# EAGLE board snc98_Display_15x7-Seg_1-digit_SC52 (EAGLE 6.6.0), part 1 of 3
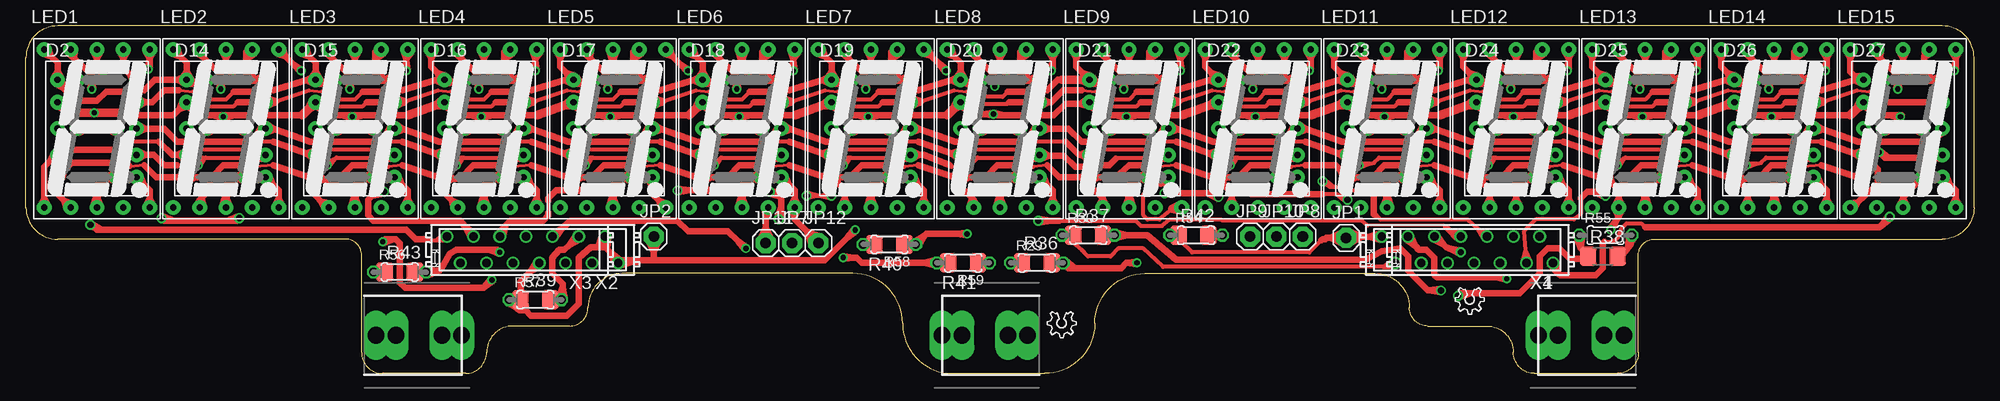
[diagram p0: board, top side]
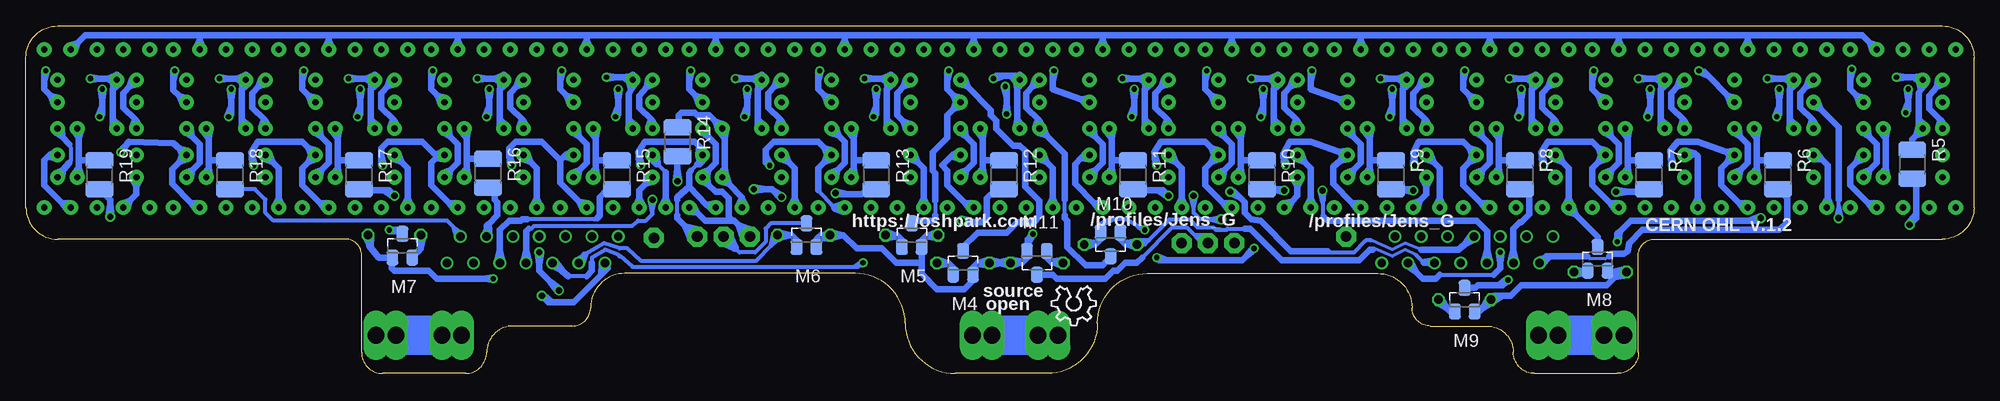
[diagram p1: board, bottom side, seen from below]

Size 187.96 x 33.53 mm. Coordinates in mm from the lower left corner, seen from the top.
Outline: 187.96,30.48 arc90 184.91,33.53 3.05,33.53 arc90 0,30.48 0,16 arc90 3.05,12.95 30.86,12.95 arc-90 32.38,11.43 32.38,2.03 arc90 34.42,0 42.42,0 arc90 44.45,2.03 arc-90 46.99,4.57 52.45,4.57 arc90 54.23,6.35 arc-90 57.53,9.65 79.76,9.65 arc-90 84.58,4.83 arc90 89.41,0 98.3,0 arc90 103.12,4.83 arc-90 107.95,9.65 130.18,9.65 arc-90 133.48,6.35 arc90 135.25,4.57 140.97,4.57 arc-90 143.51,2.03 arc90 145.54,0 153.54,0 arc90 155.57,2.03 155.57,11.43 arc-90 157.1,12.95 184.91,12.95 arc90 187.96,16 187.96,30.48
Copper layers (1*16): Top 0.0356mm / dielectric 1.5011mm / Bottom 0.0356mm
Design rules "OSHPark-2layer *": minimum track width 12mil, minimum drill 13mil, track to track 6mil, track to pad 6mil, pad to pad 6mil, via to via 6mil, smd to smd 6mil, copper to edge 15mil, drill to drill 6mil, minimum pad ring 7mil, minimum via ring 7mil, stop-mask expansion 2.5mil, vias tented up to drill 0mil, thermal gap 10mil

## Footprints (pad centres in the part's own frame; a part is rotated, then mirrored left to right if it is on the bottom)
BATTERY-AAA-LEFT = drill 1.6 long: P1 -2.413,0; P2 3.937,0; P3 2.032,0; P4 -4.318,0
BATTERY-AAA-RIGHT = drill 1.6 long: M1 -3.937,0; M2 2.413,0; M3 4.318,0; M4 -2.032,0
10MM_UNI = drill 0.6 pad 1.422: 1 -3.81,4.699; 2 -3.81,2.54; 3 -3.81,0; 4 -3.81,-2.54; 5 -3.81,-4.699; 6 3.81,-4.699; 7 3.81,-2.54; 8 3.81,0; 9 3.81,2.54; 10 3.81,4.699; 11 -1.905,4.699; 12 -1.905,0; 13 1.905,0; 14 1.905,-4.699
1X01 = drill 1.016 pad 1.93 octagon: 1 0,0
SA52-11 = drill 0.6 pad 1.422: 1 -5.08,-7.62; 2 -2.54,-7.62; 3 0,-7.62; 4 2.54,-7.62; 5 5.08,-7.62; 6 5.08,7.62; 7 2.54,7.62; 8 0,7.62; 9 -2.54,7.62; 10 -5.08,7.62
SOT-23 = smd 1.143 x 1.524: 1 0.953,1.143; 2 -0.953,1.143; 3 0,-1.143
R1210 = smd 1.6 x 2.7: 1 -1.4,0; 2 1.4,0
0204/5 = drill 0.813 octagon: 1 -2.54,0; 2 2.54,0
R1206 = smd 1.6 x 1.803: 1 -1.422,0; 2 1.422,0
MICROMATCH-12 = drill 0.813: 1 6.985,-1.27; 2 5.715,1.27; 3 4.445,-1.27; 4 3.175,1.27; 5 1.905,-1.27; 6 0.635,1.27; 7 -0.635,-1.27; 8 -1.905,1.27; 9 -3.175,-1.27; 10 -4.445,1.27; 11 -5.715,-1.27; 12 -6.985,1.27
MICROMATCH-14 = drill 0.813: 1 8.255,-1.27; 2 6.985,1.27; 3 5.715,-1.27; 4 4.445,1.27; 5 3.175,-1.27; 6 1.905,1.27; 7 0.635,-1.27; 8 -0.635,1.27; 9 -1.905,-1.27; 10 -3.175,1.27; 11 -4.445,-1.27; 12 -5.715,1.27; 13 -6.985,-1.27; 14 -8.255,1.27

## Placement (x,y rotation side)
BH4  HOLDER_AAA_LEFT1  [BATTERY-AAA-LEFT]  150.24,3.68 0 top
BH5  HOLDER_AAA_LEFT1  [BATTERY-AAA-LEFT]  92.71,3.68 0 top
BH6  HOLDER_AAA_RIGHT  [BATTERY-AAA-RIGHT]  37.72,3.68 0 top
D2  SC40-11_UNISC40-11_UNI  [10MM_UNI]  6.86,23.62 0 top
D14  SC40-11_UNISC40-11_UNI  [10MM_UNI]  19.3,23.62 0 top
D15  SC40-11_UNISC40-11_UNI  [10MM_UNI]  31.75,23.62 0 top
D16  SC40-11_UNISC40-11_UNI  [10MM_UNI]  44.2,23.62 0 top
D17  SC40-11_UNISC40-11_UNI  [10MM_UNI]  56.64,23.62 0 top
D18  SC40-11_UNISC40-11_UNI  [10MM_UNI]  69.09,23.62 0 top
D19  SC40-11_UNISC40-11_UNI  [10MM_UNI]  81.53,23.62 0 top
D20  SC40-11_UNISC40-11_UNI  [10MM_UNI]  93.98,23.62 0 top
D21  SC40-11_UNISC40-11_UNI  [10MM_UNI]  106.43,23.62 0 top
D22  SC40-11_UNISC40-11_UNI  [10MM_UNI]  118.87,23.62 0 top
D23  SC40-11_UNISC40-11_UNI  [10MM_UNI]  131.32,23.62 0 top
D24  SC40-11_UNISC40-11_UNI  [10MM_UNI]  143.76,23.62 0 top
D25  SC40-11_UNISC40-11_UNI  [10MM_UNI]  156.21,23.62 0 top
D26  SC40-11_UNISC40-11_UNI  [10MM_UNI]  168.66,23.62 0 top
D27  SC40-11_UNISC40-11_UNI  [10MM_UNI]  181.1,23.62 0 top
JP1  [1X01]  127.38,13.08 0 top
JP2  [1X01]  60.58,13.21 0 top
JP7  [1X01]  73.91,12.57 0 top
JP8  [1X01]  123.19,13.21 0 top
JP9  [1X01]  118.11,13.21 0 top
JP10  [1X01]  120.65,13.21 0 top
JP11  [1X01]  71.37,12.57 0 top
JP12  [1X01]  76.45,12.57 0 top
LED1  7-SEG_SC52-11  [SA52-11]  6.86,23.62 0 top
LED2  7-SEG_SC52-11  [SA52-11]  19.3,23.62 0 top
LED3  7-SEG_SC52-11  [SA52-11]  31.75,23.62 0 top
LED4  7-SEG_SC52-11  [SA52-11]  44.2,23.62 0 top
LED5  7-SEG_SC52-11  [SA52-11]  56.64,23.62 0 top
LED6  7-SEG_SC52-11  [SA52-11]  69.09,23.62 0 top
LED7  7-SEG_SC52-11  [SA52-11]  81.53,23.62 0 top
LED8  7-SEG_SC52-11  [SA52-11]  93.98,23.62 0 top
LED9  7-SEG_SC52-11  [SA52-11]  106.43,23.62 0 top
LED10  7-SEG_SC52-11  [SA52-11]  118.87,23.62 0 top
LED11  7-SEG_SC52-11  [SA52-11]  131.32,23.62 0 top
LED12  7-SEG_SC52-11  [SA52-11]  143.76,23.62 0 top
LED13  7-SEG_SC52-11  [SA52-11]  156.21,23.62 0 top
LED14  7-SEG_SC52-11  [SA52-11]  168.66,23.62 0 top
LED15  7-SEG_SC52-11  [SA52-11]  181.1,23.62 0 top
LOGO1  OSHW_LOGO_8MILX0150-NT  [OSHW_8X150_NOTEXT]  84.73,8.43 180 bottom
LOGO2  OSHW_LOGO_6MILX0100-NT  [OSHW_6X100_NOTEXT]  101.35,5.97 180 top
LOGO3  OSHW_LOGO_6MILX0100-NT  [OSHW_6X100_NOTEXT]  140.72,8.26 180 top
M4  IRLML2244  [SOT-23]  97.54,10.67 180 bottom
M5  IRLML2244  [SOT-23]  102.49,13.34 180 bottom
M6  IRLML2244  [SOT-23]  112.65,13.34 180 bottom
M7  IRLML2244  [SOT-23]  151.64,12.32 180 bottom
M8  IRLML2244  [SOT-23]  36.32,11.05 180 bottom
M9  IRLML2244  [SOT-23]  49.15,7.11 180 bottom
M10  IRLML2244  [SOT-23]  83.31,12.45 0 bottom
M11  IRLML2244  [SOT-23]  90.42,10.67 0 bottom
R5  22  [R1210]  5.97,20.19 270 bottom
R6  22  [R1210]  18.92,19.18 270 bottom
R7  22  [R1210]  31.37,19.18 270 bottom
R8  22  [R1210]  43.81,19.18 270 bottom
R9  22  [R1210]  56.26,19.18 270 bottom
R10  22  [R1210]  68.71,19.18 270 bottom
R11  22  [R1210]  81.15,19.18 270 bottom
R12  22  [R1210]  93.6,19.18 270 bottom
R13  22  [R1210]  105.92,19.18 270 bottom
R14  22  [R1210]  125.09,22.35 270 bottom
R15  22  [R1210]  130.94,19.18 270 bottom
R16  22  [R1210]  143.38,19.3 270 bottom
R17  22  [R1210]  155.83,19.18 270 bottom
R18  22  [R1210]  168.28,19.18 270 bottom
R19  22  [R1210]  180.85,19.18 270 bottom
R29  3k3  [0204/5]  97.54,10.67 0 top
R30  3k3  [0204/5]  102.49,13.34 0 top
R36  3k3  [R1206]  97.54,10.67 0 top
R37  3k3  [R1206]  102.49,13.34 0 top
R38  3k3  [R1206]  152.15,11.3 0 top
R39  3k3  [R1206]  49.15,7.11 0 top
R40  3k3  [R1206]  83.31,12.45 180 top
R41  3k3  [R1206]  90.42,10.67 180 top
R42  3k3  [R1206]  112.65,13.34 0 top
R43  3k3  [R1206]  36.07,9.78 0 top
R54  3k3  [0204/5]  112.9,13.34 0 top
R55  3k3  [0204/5]  152.4,13.34 0 top
R56  3k3  [0204/5]  36.07,9.78 0 top
R57  3k3  [0204/5]  49.15,7.11 0 top
R58  3k3  [0204/5]  83.31,12.45 180 top
R59  3k3  [0204/5]  90.42,10.67 180 top
X1  MICROMATCH-12  [MICROMATCH-12]  140.34,11.94 180 top
X2  MICROMATCH-14  [MICROMATCH-14]  48.9,11.94 180 top
X3  MICROMATCH-12  [MICROMATCH-12]  47.62,11.94 180 top
X4  MICROMATCH-14  [MICROMATCH-14]  139.06,11.94 180 top

## Library data of the parts
BH4-BH6 = SparkFun-Electromechanical
D2 D14-D27 = display-hp
JP1 JP2 JP7-JP12 = adafruit
LED1-LED15 = display-kingbright; OC_FARNELL: unknown; OC_NEWARK: unknown
LOGO1-LOGO3 = ohw-logo
M4-M11 = IRLML6402
R5-R19 R29 R30 R36-R43 R54-R59 = rcl
X1 X3 = Con-amp-micromatch; MF: FARNELL; MPN: 8-215464-2; OC_FARNELL: 3784666; OC_NEWARK: 95H9857
X2 X4 = Con-amp-micromatch; MF: FARNELL; MPN: 8-215464-4; OC_FARNELL: 3784678; OC_NEWARK: 19J6431

## Nets
CA_LED: JP1.1 JP2.1 M4.2 M5.2 M6.2 M7.2 M8.2 M9.2 M10.2 M11.2 R29.1 R30.1 R36.1 R37.1 R38.1 R39.1 R40.1 R41.1 R42.1 R43.1 R54.1 R55.1 R56.1 R57.1 R58.1 R59.1 X2.8 X2.13 X2.14 X3.8 X4.1 X4.2
D0_A: R5.2 X2.1 X3.1
D1_A: R6.2 X2.2 X3.2
D2_A: R7.2 X2.3 X3.3
D3_A: R8.2 X2.4 X3.4
D4_A: R9.2 X2.5 X3.5
D5_A: R10.2 X2.6 X3.6
D6_A: R11.2 X2.7 X3.7
D7_A: R12.2 X1.5 X4.7
D8_A: R13.2 X1.6 X4.8
D9_A: R14.2 X1.7 X4.9
D10_A: R15.2 X1.8 X4.10
D11_A: R16.2 X1.9 X4.11
D12_A: R17.2 X1.10 X4.12
D13_A: R18.2 X1.11 X4.13
D14_A: R19.2 X1.12 X4.14
DIG_0: D2.11 D2.12 D2.13 D2.14 LED1.3 LED1.8 R5.1
DIG_1: D14.11 D14.12 D14.13 D14.14 LED2.3 LED2.8 R6.1
DIG_2: D15.11 D15.12 D15.13 D15.14 LED3.3 LED3.8 R7.1
DIG_3: D16.11 D16.12 D16.13 D16.14 LED4.3 LED4.8 R8.1
DIG_4: D17.11 D17.12 D17.13 D17.14 LED5.3 LED5.8 R9.1
DIG_5: D18.11 D18.12 D18.13 D18.14 LED6.3 LED6.8 R10.1
DIG_6: D19.11 D19.12 D19.13 D19.14 LED7.3 LED7.8 R11.1
DIG_7: D20.11 D20.12 D20.13 D20.14 LED8.3 LED8.8 R12.1
DIG_8: D21.11 D21.12 D21.13 D21.14 LED9.3 LED9.8 R13.1
DIG_9: D22.11 D22.12 D22.13 D22.14 LED10.3 LED10.8 R14.1
DIG_10: D23.11 D23.12 D23.13 D23.14 LED11.3 LED11.8 R15.1
DIG_11: D24.11 D24.12 D24.13 D24.14 LED12.3 LED12.8 R16.1
DIG_12: D25.11 D25.12 D25.13 D25.14 LED13.3 LED13.8 R17.1
DIG_13: D26.11 D26.12 D26.13 D26.14 LED14.3 LED14.8 R18.1
DIG_14: D27.11 D27.12 D27.13 D27.14 LED15.3 LED15.8 R19.1
IO-A: M4.1 R29.2 R36.2 X1.4 X4.6
IO-B: M5.1 R30.2 R37.2 X1.3 X4.5
IO-C: M6.1 R42.2 R54.2 X1.2 X4.4
IO-D: M7.1 R38.2 R55.2 X1.1 X4.3
IO-DP: M11.1 R41.2 R59.2 X2.9 X3.9
IO-E: M8.1 R43.2 R56.2 X2.12 X3.12
IO-F: M9.1 R39.2 R57.2 X2.11 X3.11
IO-G: M10.1 R40.2 R58.2 X2.10 X3.10
NC1: BH4.P1 BH4.P2 BH4.P3 BH4.P4
NC2: BH5.P1 BH5.P2 BH5.P3 BH5.P4
NC3: BH6.M1 BH6.M2 BH6.M3 BH6.M4
SEG_A: D2.10 D14.10 D15.10 D16.10 D17.10 D18.10 D19.10 D20.10 D21.10 D22.10 D23.10 D24.10 D25.10 D26.10 D27.10 LED1.7 LED2.7 LED3.7 LED4.7 LED5.7 LED6.7 LED7.7 LED8.7 LED9.7 LED10.7 LED11.7 LED12.7 LED13.7 LED14.7 LED15.7 M4.3
SEG_B: D2.9 D14.9 D15.9 D16.9 D17.9 D18.9 D19.9 D20.9 D21.9 D22.9 D23.9 D24.9 D25.9 D26.9 D27.9 LED1.6 LED2.6 LED3.6 LED4.6 LED5.6 LED6.6 LED7.6 LED8.6 LED9.6 LED10.6 LED11.6 LED12.6 LED13.6 LED14.6 LED15.6 M5.3
SEG_C: D2.7 D14.7 D15.7 D16.7 D17.7 D18.7 D19.7 D20.7 D21.7 D22.7 D23.7 D24.7 D25.7 D26.7 D27.7 JP8.1 JP11.1 LED1.4 LED2.4 LED3.4 LED4.4 LED5.4 LED6.4 LED7.4 LED8.4 LED9.4 LED10.4 LED11.4 LED12.4 LED13.4 LED14.4 LED15.4
SEG_C_SOURCE: JP10.1 M6.3
SEG_D: D2.5 D14.5 D15.5 D16.5 D17.5 D18.5 D19.5 D20.5 D21.5 D22.5 D23.5 D24.5 D25.5 D26.5 D27.5 LED1.2 LED2.2 LED3.2 LED4.2 LED5.2 LED6.2 LED7.2 LED8.2 LED9.2 LED10.2 LED11.2 LED12.2 LED13.2 LED14.2 LED15.2 M7.3
SEG_DP: D2.6 D2.8 D14.6 D14.8 D15.6 D15.8 D16.6 D16.8 D17.6 D17.8 D18.6 D18.8 D19.6 D19.8 D20.6 D20.8 D21.6 D21.8 D22.6 D22.8 D23.6 D23.8 D24.6 D24.8 D25.6 D25.8 D26.6 D26.8 D27.6 D27.8 JP9.1 JP12.1 LED1.5 LED2.5 LED3.5 LED4.5 LED5.5 LED6.5 LED7.5 LED8.5 LED9.5 LED10.5 LED11.5 LED12.5 LED13.5 LED14.5 LED15.5
SEG_DP_SOURCE: JP7.1 M11.3
SEG_E: D2.4 D14.4 D15.4 D16.4 D17.4 D18.4 D19.4 D20.4 D21.4 D22.4 D23.4 D24.4 D25.4 D26.4 D27.4 LED1.1 LED2.1 LED3.1 LED4.1 LED5.1 LED6.1 LED7.1 LED8.1 LED9.1 LED10.1 LED11.1 LED12.1 LED13.1 LED14.1 LED15.1 M8.3
SEG_F: D2.2 D14.2 D15.2 D16.2 D17.2 D18.2 D19.2 D20.2 D21.2 D22.2 D23.2 D24.2 D25.2 D26.2 D27.2 LED1.9 LED2.9 LED3.9 LED4.9 LED5.9 LED6.9 LED7.9 LED8.9 LED9.9 LED10.9 LED11.9 LED12.9 LED13.9 LED14.9 LED15.9 M9.3
SEG_G: D2.1 D2.3 D14.1 D14.3 D15.1 D15.3 D16.1 D16.3 D17.1 D17.3 D18.1 D18.3 D19.1 D19.3 D20.1 D20.3 D21.1 D21.3 D22.1 D22.3 D23.1 D23.3 D24.1 D24.3 D25.1 D25.3 D26.1 D26.3 D27.1 D27.3 LED1.10 LED2.10 LED3.10 LED4.10 LED5.10 LED6.10 LED7.10 LED8.10 LED9.10 LED10.10 LED11.10 LED12.10 LED13.10 LED14.10 LED15.10 M10.3

## Tracks (layer width: path | path; a pad name or v marks a point on that pad's centre or on a via)
CA_LED  (via drill 0.51, 0.6)
  Top 0.406: 52.7,6.22 52.7,6.1 | 124.97,12.83 123.83,11.68 112.51,11.68 111.44,12.76 | 102.11,11.68 101.9,11.87 | 101.9,11.87 101.09,12.57 101.09,12.91 | 101.09,12.91 101.09,13.31 R37.1 | 111.44,12.76 111.4,12.79 | X4.2 131.57,10.67 131.06,10.29 130.92,10.29 | 130.92,10.29 109.73,10.29 107.82,12.06 105.41,12.06 104.65,11.3 102.46,11.3 101.9,11.87 | 101.09,12.91 100.21,13.65 R30.1 99.94,12.93 101.09,12.91 | 111.44,12.76 110.66,13.61 R54.1 110.3,12.93 111.44,12.76 | 130.92,10.29 132.07,10.26 X4.2 | 130.92,10.29 131.83,10.99 X4.2
  Top 0.61: R43.1 R56.1 | 60.33,10.92 77.09,10.92 79.29,13.12 | 60.33,10.92 59.18,10.92 | 59.18,10.92 58.34,10.92 | 58.34,10.92 57.15,10.92 56.42,11.65 | 79.29,13.12 v80.01,13.84 | R36.1 R29.1 | R37.1 101.07,13.36 100.97,13.46 100.08,13.46 R30.1 | R54.1 110.85,13.31 R42.1 111.4,13.17 111.4,12.79 | 56.42,11.65 56.07,12 | 56.07,12 55.88,12.19 | 55.88,12.19 55.21,12.19 | 55.21,12.19 54.48,12.19 53.34,11.18 53.34,6.73 52.7,6.1 52.2,5.59 48.72,5.59 48.21,6.1 47.62,6.1 47.47,6.25 | X4.1 129.59,13.21 | 129.59,13.21 128.9,13.21 | 128.9,13.21 126.75,13.21 JP1.1 | JP1.1 125.86,13.08 | 125.86,13.08 125.48,13.08 125.35,12.95 125.09,12.95 124.97,12.83 | X2.13 55.88,12.19 | X2.14 58.37,10.75 | 58.37,10.75 59.05,10.79 59.18,10.92 | JP2.1 60.58,11.68 | 60.58,11.68 60.58,11.18 60.33,10.92 | R58.1 R40.1 | R58.1 85.27,12.45 | 47.75,7.09 R39.1 | 47.62,7.21 R39.1 | R41.1 R59.1 | v90.81,13.46 89.79,13.46 | 89.79,13.46 86.87,13.46 86.71,13.31 | 86.71,13.31 R58.1 | R39.1 R57.1 | 47.47,6.25 R57.1 | 149.99,12.12 149.99,12.06 150.72,11.33 R38.1 150.5,11.07 148.95,11.07 147.96,12.06 146.81,12.06 146.05,11.3 146.05,9.65 144.15,7.75 139.35,7.75 | 149.99,12.12 149.99,13.21 R55.1 | 139.35,7.75 138.43,7.75 v138.18,7.49 | X2.8 48.67,9.81 | 48.67,9.81 47.75,8.89 47.75,7.54 | 47.75,7.54 47.75,7.09 | 47.75,7.09 47.82,7.01 | 47.82,7.01 48.21,6.63 | 79.29,13.12 80.09,13.74 v80.01,13.84 | 79.29,13.12 79.91,13.92 v80.01,13.84 | 89.79,13.46 90.79,13.34 v90.81,13.46 | 89.79,13.46 90.79,13.59 v90.81,13.46 | 139.35,7.75 138.16,7.67 v138.18,7.49 | 139.35,7.75 138.24,7.33 v138.18,7.49 | 149.99,12.12 150.16,13.29 R55.1 | 149.99,12.12 149.57,13.23 R55.1 | 48.67,9.81 49.69,10.4 X2.8
  Top 0.61: 48.67,9.81 49.27,10.82 X2.8 | 129.59,13.21 130.73,12.91 X4.1 | 129.59,13.21 130.73,13.5 X4.1 | 58.34,10.92 57.16,10.97 X2.14 | 58.34,10.92 57.29,10.39 X2.14 | 56.42,11.65 56.87,10.55 X2.14 | 56.42,11.65 57.34,10.9 X2.14 | 58.37,10.75 57.21,10.97 X2.14 | 58.37,10.75 57.25,10.38 X2.14 | 56.07,12 56.18,13.18 X2.13 | 56.07,12 55.6,13.09 X2.13 | 55.21,12.19 56.08,12.98 X2.13 | 55.21,12.19 55.59,13.31 X2.13 | 128.9,13.21 127.62,13.7 JP1.1 | 128.9,13.21 127.72,12.51 JP1.1 | 125.86,13.08 127.09,12.49 JP1.1 | 125.86,13.08 127.09,13.68 JP1.1 | 60.58,11.68 61.17,12.92 JP2.1 | 60.58,11.68 59.98,12.92 JP2.1 | 47.47,6.25 46.87,7.27 R57.1 | 47.47,6.25 46.45,6.85 R57.1 | 47.75,7.54 46.58,7.42 R57.1 | 47.75,7.54 46.78,6.86 R57.1 | 47.82,7.01 46.71,7.4 R57.1 | 47.82,7.01 46.66,6.81 R57.1 | 86.71,13.31 85.7,12.71 R58.1 | 86.71,13.31 86.11,12.29 R58.1
  Bottom 0.406: v80.01,13.84 80.89,14.35 | 80.89,14.35 81.79,14.86 83.19,14.86 | 80.89,14.35 79.94,14.06 v80.01,13.84 | 80.89,14.35 80.17,13.68 v80.01,13.84
  Bottom 0.61: 34.75,9.79 M8.2 35.26,9.78 34.75,9.78 | 34.75,9.79 34.24,9.7 34.65,9.29 | 34.65,9.29 35.43,8.51 43.69,8.51 44.7,7.49 45.45,7.49 | 45.45,7.49 46.23,7.49 R57.1 | 34.75,9.78 R56.1 | 96.21,10.57 96.6,10.19 M4.2 96.65,9.6 96.65,8.89 97.41,8.13 100.08,8.13 101.55,9.6 101.55,10.67 | 96.21,10.57 R36.1 R29.1 | 101.16,13.24 101.55,12.85 M5.2 101.55,12.31 101.55,10.67 | 101.16,13.24 R37.1 R30.1 | R58.1 84.84,12.45 | M9.2 47.75,5.97 47.47,6.25 | 47.47,6.25 R57.1 | 84.64,12.54 84.25,12.93 M10.2 84.25,13.92 84.25,14.17 83.95,14.48 83.19,14.86 | 84.64,12.54 R40.1 R58.1 | 91.75,10.77 91.36,11.15 M11.2 91.31,11.73 91.31,12.58 | 91.75,10.77 R41.1 R59.1 | 91.31,12.58 91.31,12.95 v90.81,13.46 | R59.1 93.78,10.67 | 93.78,10.67 94.18,10.67 | 94.18,10.67 R29.1 | X4.2 131.83,10.16 132.47,9.51 | M7.2 R38.1 150.72,11.33 150.11,11.81 | 150.11,11.81 149.86,12.06 149.86,12.12 | 149.86,12.12 R55.1 | 150.11,11.81 150.62,11.3 150.75,11.3 | 132.47,9.51 135.13,6.86 137.16,6.86 | M6.2 111.7,12.87 111.54,13.02 | 111.54,13.02 R42.1 R54.1 | 101.55,10.67 104.01,10.67 105.41,12.06 107.82,12.06 109.09,13.34 109.14,13.34 | R54.1 109.14,13.34 | v138.18,7.49 137.54,6.86 137.16,6.86 | 91.31,12.58 90.92,13.51 v90.81,13.46 | 91.31,12.58 90.7,13.38 v90.81,13.46 | 137.16,6.86 138.25,7.33 v138.18,7.49 | 137.16,6.86 138.06,7.62 v138.18,7.49 | 96.21,10.57 95.1,10.96 R29.1 | 96.21,10.57 95.05,10.37 R29.1 | 93.78,10.67 94.92,10.37 R29.1 | 93.78,10.67 94.92,10.96 R29.1 | 101.16,13.24 100.05,13.62 R30.1 | 101.16,13.24 100,13.04 R30.1 | 111.54,13.02 110.51,13.6 R54.1 | 111.54,13.02 110.36,13.03 R54.1 | 109.14,13.34 110.29,13.04 R54.1 | 109.14,13.34 110.29,13.63 R54.1
  Bottom 0.61: 149.86,12.12 150.16,13.26 R55.1 | 149.86,12.12 149.56,13.26 R55.1 | 34.75,9.79 33.6,10.07 R56.1 | 34.75,9.79 33.61,9.48 R56.1 | 34.65,9.29 33.72,10.02 R56.1 | 34.65,9.29 33.48,9.48 R56.1 | 34.75,9.78 33.6,10.07 R56.1 | 34.75,9.78 33.6,9.48 R56.1 | 132.47,9.51 132.38,10.69 X4.2 | 132.47,9.51 131.82,10.5 X4.2 | 45.45,7.49 46.44,6.86 R57.1 | 45.45,7.49 46.63,7.42 R57.1 | 47.47,6.25 46.87,7.27 R57.1 | 47.47,6.25 46.45,6.85 R57.1 | 84.64,12.54 85.75,12.16 R58.1 | 84.64,12.54 85.8,12.75 R58.1 | 91.75,10.77 92.86,10.38 R59.1 | 91.75,10.77 92.91,10.97 R59.1 | 94.18,10.67 93.04,10.96 R59.1 | 94.18,10.67 93.04,10.37 R59.1
D0_A  (via drill 0.6)
  Top 0.406: 38.61,12.95 38.73,12.95 38.86,12.83 39.48,12.83 | 39.48,12.83 40.39,12.83 40.51,12.95 | 39.48,12.83 40.63,12.8 X2.1 40.39,13.53 39.48,12.83
  Top 0.61: 7.31,13.84 36.7,13.84 37.59,12.95 38.61,12.95 | 7.31,13.84 6.86,13.84 6.35,14.35 v6.22,14.35 | X2.1 40.77,13.21 40.51,12.95 | 7.31,13.84 6.32,14.5 v6.22,14.35 | 7.31,13.84 6.17,14.19 v6.22,14.35
  Bottom 0.61: 5.59,15.37 5.59,14.99 v6.22,14.35 | 5.59,15.37 5.59,18.41 R5.2 | 5.59,15.37 6.07,14.28 v6.22,14.35 | 5.59,15.37 6.36,14.46 v6.22,14.35
D1_A
  Bottom 0.305: 35.31,11.3 35.56,11.05 37.08,11.05 37.34,11.3
  Bottom 0.406: 35.18,11.3 35.31,11.3
  Bottom 0.61: R6.2 18.03,16.89 18.03,14.61 18.8,13.84 32,13.84 33.27,12.57 33.4,11.81 33.78,11.56 34.92,11.56 35.18,11.3 | 37.34,11.3 40.87,11.3 | 40.87,11.3 41.27,11.3 X2.2 | 40.87,11.3 41.69,10.46 X2.2 | 40.87,11.3 42,10.96 X2.2
D2_A  (via drill 0.6)
  Top 0.61: X2.3 41.91,14.73 33.53,14.73 33.02,15.24 33.02,16.76 33.41,17.15 | 33.41,17.15 33.66,17.4 34.16,17.4 v34.54,17.53 | 33.41,17.15 34.57,17.36 v34.54,17.53 | 33.41,17.15 34.47,17.68 v34.54,17.53 | X2.3 42.9,13.08 42.4,14.14 43.36,13.46 X2.3
  Bottom 0.61: v34.54,17.53 33.34,17.53 | 33.34,17.53 31.62,17.53 R7.2 | 33.34,17.53 34.52,17.36 v34.54,17.53 | 33.34,17.53 34.52,17.7 v34.54,17.53
D3_A
  Bottom 0.61: R8.2 43.69,17.78 42.93,17.02 42.93,15.37 43.69,14.61 43.81,14.61 44.45,13.97 44.45,11.89 | 44.45,11.89 X2.4 | 44.45,11.89 44.16,10.74 X2.4 | 44.45,11.89 44.74,10.74 X2.4
D4_A  (via drill 0.6)
  Top 0.406: 50.42,16.64 50.42,15.49
  Top 0.61: v54.1,17.65 52.9,17.65 | 52.9,17.65 51.18,17.65 50.42,16.89 50.42,16.64 | 50.42,15.49 50.42,15.24 49.91,14.73 46.74,14.73 46.29,14.29 | 46.29,14.29 45.97,13.97 X2.5 | 52.9,17.65 54.08,17.48 v54.1,17.65 | 52.9,17.65 54.08,17.82 v54.1,17.65 | 46.29,14.29 45.49,13.41 X2.5 | 46.29,14.29 46.02,13.14 X2.5
  Bottom 0.61: R9.2 55.3,17.78 | 55.3,17.78 54.23,17.78 v54.1,17.65 | 55.3,17.78 54.11,17.83 v54.1,17.65 | 55.3,17.78 54.14,17.48 v54.1,17.65
D5_A  (via drill 0.6)
  Top 0.61: v66.55,17.65 65.35,17.65 | 65.35,17.65 64.06,17.65 | 64.06,17.65 v62.87,17.65 | 65.35,17.65 66.52,17.48 v66.55,17.65 | 65.35,17.65 66.52,17.82 v66.55,17.65 | 64.06,17.65 62.89,17.82 v62.87,17.65 | 64.06,17.65 62.89,17.48 v62.87,17.65
  Bottom 0.406: 62.87,16.76 62.87,16.45 | 62.87,16.45 62.87,15.24 62.74,15.11 | 62.87,16.45 63.13,17.59 v62.87,17.65 62.6,17.59 62.87,16.45
  Bottom 0.61: 46.99,11.89 46.99,13.72 48.01,14.73 62.36,14.73 62.74,15.11 | 46.99,11.89 X2.6 | R10.2 67.74,17.78 | 67.74,17.78 66.67,17.78 v66.55,17.65 | v62.87,17.65 62.87,16.76 | 67.74,17.78 66.56,17.83 v66.55,17.65 | 67.74,17.78 66.59,17.48 v66.55,17.65 | 46.99,11.89 46.7,10.74 X2.6 | 46.99,11.89 47.28,10.74 X2.6
D6_A  (via drill 0.6)
  Top 0.406: v75.31,17.14 76.51,17.14 | 76.51,17.14 76.52,17.14 | 76.52,17.14 v77.72,17.14 | 76.51,17.14 75.37,17.41 v75.31,17.14 | 76.51,17.14 75.37,16.88 v75.31,17.14 | 76.52,17.14 77.66,16.88 v77.72,17.14 | 76.52,17.14 77.66,17.41 v77.72,17.14
  Top 0.61: v71.75,17.53 72.39,17.53 72.86,17.06 | 72.86,17.06 72.9,17.02 72.9,16.03 | 72.9,16.03 72.9,14.99 v72.64,14.86 | 72.86,17.06 71.84,17.67 v71.75,17.53 | 72.86,17.06 71.71,17.36 v71.75,17.53 | 72.9,16.03 72.48,14.92 v72.64,14.86 | 72.9,16.03 72.82,14.85 v72.64,14.86
  Bottom 0.305: 53.34,11.94 54.86,12.57 56.13,11.94 58.17,12.83
  Bottom 0.406: 58.17,12.83 58.67,12.83 59.82,11.68 62.23,11.68 62.36,11.81 | v77.72,17.14 77.85,17.27 | 73.03,14.86 73.84,14.86 | 73.84,14.86 74.68,14.86 75.31,15.49 75.31,15.95 | 75.31,15.95 v75.31,17.14 | 73.84,14.86 72.71,15.13 v72.64,14.86 72.71,14.59 73.84,14.86 | 75.31,15.95 75.58,17.08 v75.31,17.14 | 75.31,15.95 75.04,17.08 v75.31,17.14
  Bottom 0.61: 53.34,11.94 49.78,11.94 X2.7 | 62.36,11.81 65.91,11.81 68.83,14.73 69.72,14.86 70.36,15.49 70.36,16.51 70.74,16.89 | 77.85,17.27 78.23,17.65 78.81,17.65 | 78.81,17.65 81.03,17.65 R11.2 | 70.74,16.89 71.37,17.53 v71.75,17.53 | v72.64,14.86 73.03,14.86 | 70.74,16.89 71.83,17.37 v71.75,17.53 | 70.74,16.89 71.64,17.66 v71.75,17.53 | 78.81,17.65 77.67,17.31 v77.72,17.14 77.82,17 78.81,17.65 | X2.7 48.51,13.39 49.2,12.43 48.13,12.93 X2.7
D7_A  (via drill 0.6)
  Top 0.305: 137.03,13.97 136.78,14.28 129.41,14.28
  Top 0.406: 99.69,14.73 107.06,14.73 107.57,14.22 109.6,14.22 110.36,14.86 115.32,14.86 115.44,14.73 128.91,14.73 129.41,14.28 | 137.03,14.1 137.03,13.97
  Top 0.61: v97.66,14.73 98.86,14.73 | 98.86,14.73 99.69,14.73 | X4.7 137.92,13.21 137.35,13.78 | 137.35,13.78 137.03,14.1 | 98.86,14.73 97.69,14.9 v97.66,14.73 | 98.86,14.73 97.69,14.56 v97.66,14.73 | 137.35,13.78 138.22,12.98 X4.7 | 137.35,13.78 138.5,13.51 X4.7
  Bottom 0.61: R12.2 94.36,17.78 95.25,16.89 95.25,14.99 95.63,14.61 96.47,14.61 | 96.47,14.61 97.54,14.61 v97.66,14.73 | 96.47,14.61 97.66,14.56 v97.66,14.73 | 96.47,14.61 97.62,14.9 v97.66,14.73
D8_A  (via drill 0.6)
  Top 0.406: v127.51,16.76 126.49,17.27 126.42,17.27 | 126.42,17.27 125.09,17.27 | 126.42,17.27 127.34,16.55 v127.51,16.76 | 126.42,17.27 127.56,17.03 v127.51,16.76
  Top 0.61: v109.86,17.4 111.06,17.4 | 111.06,17.4 113.92,17.4 | 113.92,17.4 114.43,17.4 v115.06,17.02 | 125.09,17.27 118.82,17.27 | 118.82,17.27 118.24,17.27 v117.73,17.78 | 111.06,17.4 109.88,17.57 v109.86,17.4 | 111.06,17.4 109.88,17.23 v109.86,17.4 | 113.92,17.4 114.98,16.86 v115.06,17.02 | 113.92,17.4 115.09,17.19 v115.06,17.02 | 118.82,17.27 117.82,17.93 v117.73,17.78 | 118.82,17.27 117.68,17.61 v117.73,17.78
  Bottom 0.406: 127.51,15.56 127.51,15.37 128.14,14.73 128.91,14.73 129.41,14.28 129.46,14.22 138.94,14.22 139.19,13.97 139.45,13.97 | 127.51,15.56 v127.51,16.76 | 127.51,15.56 127.78,16.7 v127.51,16.76 | 127.51,15.56 127.24,16.7 v127.51,16.76
  Bottom 0.61: 139.7,11.89 139.7,13.72 139.45,13.97 | 139.7,11.89 X4.8 | R13.2 106.81,17.78 107.31,17.27 108.66,17.27 | 108.66,17.27 109.6,17.27 v109.86,17.4 | v115.06,17.02 115.06,16.89 115.95,17.78 115.99,17.78 | 115.99,17.78 116.53,17.78 | 116.53,17.78 v117.73,17.78 | 108.66,17.27 109.85,17.23 v109.86,17.4 | 108.66,17.27 109.81,17.57 v109.86,17.4 | 115.99,17.78 114.97,17.17 v115.06,17.02 | 115.99,17.78 115.19,16.9 v115.06,17.02 | 116.53,17.78 117.7,17.61 v117.73,17.78 | 116.53,17.78 117.7,17.95 v117.73,17.78 | 139.7,11.89 139.41,10.74 X4.8 | 139.7,11.89 140,10.74 X4.8
D9_A  (via drill 0.6)
  Top 0.406: 130.18,15.24 130.3,15.24 130.68,14.86 139.06,14.86 140.05,14.01 | 140.05,14.01 X4.9 | v125.09,18.54 125.22,18.54 125.73,18.03 126.18,18.03 | 126.18,18.03 126.36,18.03 128.02,17.65 129.54,17.65 129.67,17.53 | 126.18,18.03 125.27,18.76 v125.09,18.54 | 126.18,18.03 125.04,18.27 v125.09,18.54 | 140.05,14.01 140.62,13.01 X4.9 | 140.05,14.01 141.12,13.59 X4.9
  Top 0.61: 129.67,17.53 130.05,17.14 130.05,15.37 130.18,15.24
  Bottom 0.61: R14.2 125.09,19.74 | 125.09,19.74 v125.09,18.54 | 125.09,19.74 124.92,18.57 v125.09,18.54 | 125.09,19.74 125.27,18.57 v125.09,18.54
D10_A
  Bottom 0.406: 132.84,14.99 132.97,14.99 133.1,14.86 139.57,14.86
  Bottom 0.61: 132.84,14.99 132.59,15.24 132.59,17.02 131.95,17.65 131.06,17.65 R15.2 | 139.57,14.86 140.08,14.86 140.21,14.73 141.35,14.73 142.24,13.84 142.24,11.89 | 142.24,11.89 X4.10 | 142.24,11.89 141.94,10.74 X4.10 | 142.24,11.89 142.53,10.74 X4.10
D11_A
  Bottom 0.61: R16.2 142.87,17.9 142.75,17.78 142.75,16.76 142.49,16.51 142.49,15.24 143.32,14.41 | 143.32,14.41 143.51,14.22 X4.11 | 143.32,14.41 143.21,13.24 X4.11 | 143.32,14.41 143.79,13.33 X4.11
D12_A  (via drill 0.6)
  Top 0.406: 149.99,16.89 149.99,15.37 149.35,14.86 145.67,14.86 144.53,13.72 144.68,11.88 | 144.68,11.88 X4.12 | 144.68,11.88 144.39,10.77 X4.12 | 144.68,11.88 145.15,10.84 X4.12
  Top 0.61: v152.4,17.14 152.27,17.14 151.89,17.53 151.26,17.53 | 151.26,17.53 150.62,17.53 149.99,16.89 | 151.26,17.53 152.32,16.99 v152.4,17.14 | 151.26,17.53 152.43,17.32 v152.4,17.14
  Bottom 0.61: 153.49,17.65 155.83,17.65 R17.2 | 153.49,17.65 152.91,17.65 v152.4,17.14 | 153.49,17.65 152.35,17.31 v152.4,17.14 | 153.49,17.65 152.5,17 v152.4,17.14
D13_A
  Bottom 0.406: X4.13 146.05,13.46 146.78,14.19 | 146.78,14.19 147.32,14.73 164.08,14.73 164.85,15.49 164.85,16.76 165.86,17.78 R18.2 | 146.78,14.19 145.82,13.54 X4.13 | 146.78,14.19 146.44,13.09 X4.13
D14_A  (via drill 0.6)
  Top 0.406: 152.27,12.7 153.16,12.7 153.67,13.21 153.92,13.97 154.43,14.48 155.83,14.48 156.21,14.1
  Top 0.61: 152.27,12.7 152.15,12.57 152.15,10.16 151.45,9.46 148.02,9.46 147.89,9.59 | 156.21,14.1 178.82,14.1 178.98,14.26 | 178.98,14.26 179.71,14.99 179.71,15.11 v179.83,15.11 | X4.14 147.07,10.41 147.89,9.59 | 178.98,14.26 179.94,14.97 v179.83,15.11 | 178.98,14.26 179.69,15.22 v179.83,15.11 | 147.89,9.59 147.62,10.74 X4.14 | 147.89,9.59 147.09,10.46 X4.14
  Bottom 0.61: v179.83,15.11 179.83,16.31 | 179.83,16.31 179.83,16.76 R19.2 | 179.83,16.31 179.66,15.14 v179.83,15.11 | 179.83,16.31 180,15.14 v179.83,15.11
DIG_0  (via drill 0.51)
  Top 0.61: LED1.8 6.86,30.34 | 6.86,30.34 6.86,29.84 7.17,29.54 | 7.17,29.54 7.49,29.21 v7.49,28.57 | LED1.3 6.86,16.12 | 7.17,29.54 7.37,28.55 v7.49,28.57 | 7.17,29.54 7.61,28.63 v7.49,28.57 | 6.86,30.34 7.22,31.06 LED1.8 | 6.86,30.34 6.5,31.06 LED1.8
  Top 0.813: D2.14 7.86,18.92 | 7.86,18.92 7.75,18.92 6.86,18.03 6.86,16.9 | 6.86,16.9 6.86,16.12 | D2.13 7.86,23.62 | 7.86,23.62 5.85,23.62 | 5.85,23.62 D2.12 | 5.85,23.62 5.06,23.91 D2.12 | 5.85,23.62 5.06,23.34 D2.12 | 7.86,23.62 8.66,23.34 D2.13 | 7.86,23.62 8.66,23.91 D2.13 | 7.86,18.92 8.66,18.64 D2.14 | 7.86,18.92 8.66,19.21 D2.14 | 6.86,16.9 6.57,16.11 LED1.3 7.14,16.11 6.86,16.9
  Bottom 0.61: D2.11 4.95,27.81 5.14,27.44 | 5.14,27.44 5.33,27.05 5.33,24.44 | 5.33,24.44 5.33,24 D2.12 | v7.49,28.57 6.48,28.57 | 6.48,28.57 5.82,28.57 | 5.82,28.57 5.21,28.57 4.95,28.45 | 8.76,23.5 8.51,23.24 8.51,22.76 | 8.51,22.76 8.51,19.79 | 8.51,19.79 8.51,19.18 D2.14 | R5.1 5.97,22.61 5.59,22.99 | 5.59,22.99 D2.12 | 6.48,28.57 7.48,28.45 v7.49,28.57 | 6.48,28.57 7.48,28.7 v7.49,28.57 | 5.33,24.44 4.7,23.94 D2.12 | 5.33,24.44 5.36,23.64 D2.12 | 5.59,22.99 5.34,23.75 D2.12 | 5.59,22.99 4.83,23.24 D2.12 | 5.14,27.44 5.35,28.22 D2.11 | 5.14,27.44 4.64,28.07 D2.11 | 5.82,28.57 5.03,28.72 D2.11 | 5.82,28.57 5.23,28.02 D2.11 | 8.51,22.76 9.06,23.34 D2.13 8.36,23.55 8.51,22.76 | 8.51,19.79 8.36,19 D2.14 | 8.51,19.79 9.06,19.2 D2.14
  Bottom 0.813: D2.11 4.95,28.45 | D2.13 8.76,23.5
DIG_1  (via drill 0.51)
  Top 0.61: 19.71,29.44 19.3,29.84 19.3,30.34 | 19.71,29.44 19.94,29.21 v19.94,28.45 | 19.3,30.34 LED2.8 | LED2.3 19.3,16.12 | 19.71,29.44 19.81,28.43 v19.94,28.45 | 19.71,29.44 20.06,28.49 v19.94,28.45 | 19.3,30.34 19.67,31.06 LED2.8 | 19.3,30.34 18.94,31.06 LED2.8
  Top 0.813: 19.3,16.9 19.3,18.03 20.19,18.92 20.31,18.92 | 19.3,16.9 19.3,16.12 | D14.14 20.31,18.92 | D14.13 20.31,23.62 | 20.31,23.62 18.3,23.62 | 18.3,23.62 D14.12 | 18.3,23.62 17.5,23.91 D14.12 | 18.3,23.62 17.5,23.34 D14.12 | 20.31,23.62 21.11,23.34 D14.13 | 20.31,23.62 21.11,23.91 D14.13 | 20.31,18.92 21.11,18.64 D14.14 | 20.31,18.92 21.11,19.21 D14.14 | 19.3,16.9 19.02,16.11 LED2.3 19.59,16.11 19.3,16.9
  Bottom 0.61: D14.11 17.4,27.81 17.73,27.48 | 17.73,27.48 17.78,27.43 17.78,24.44 | 17.78,24.44 17.78,24 D14.12 | v19.94,28.45 18.92,28.45 | 18.92,28.45 18.29,28.45 | 18.29,28.45 17.53,28.45 D14.11 | 21.21,23.5 20.95,23.24 20.95,22.76 | 20.95,22.76 20.95,20.45 | 20.95,20.45 20.95,19.79 | 20.95,19.79 20.95,19.18 D14.14 | R6.1 20.82,20.58 20.95,20.45 | 18.92,28.45 19.92,28.32 v19.94,28.45 | 18.92,28.45 19.92,28.57 v19.94,28.45 | 17.78,24.44 17.15,23.94 D14.12 | 17.78,24.44 17.8,23.64 D14.12 | 17.73,27.48 17.8,28.28 D14.11 | 17.73,27.48 17.13,28.02 D14.11 | 18.29,28.45 17.53,28.71 D14.11 | 18.29,28.45 17.63,27.99 D14.11 | 20.95,22.76 21.5,23.34 D14.13 20.81,23.55 20.95,22.76 | 20.95,19.79 20.81,19 D14.14 | 20.95,19.79 21.5,19.2 D14.14
  Bottom 0.813: D14.13 21.21,23.5
DIG_2  (via drill 0.51)
  Top 0.61: 32.16,29.44 31.75,29.84 31.75,30.34 | 32.16,29.44 32.38,29.21 v32.38,28.45 | 31.75,30.34 LED3.8 | LED3.3 31.75,16.12 | 32.16,29.44 32.26,28.43 v32.38,28.45 | 32.16,29.44 32.5,28.49 v32.38,28.45 | 31.75,30.34 32.11,31.06 LED3.8 | 31.75,30.34 31.39,31.06 LED3.8
  Top 0.813: D15.13 32.76,23.62 | 32.76,23.62 30.75,23.62 | 30.75,23.62 D15.12 | 31.75,16.9 31.75,18.03 32.64,18.92 32.76,18.92 | 31.75,16.9 31.75,16.12 | D15.14 32.76,18.92 | 30.75,23.62 29.95,23.91 D15.12 | 30.75,23.62 29.95,23.34 D15.12 | 32.76,23.62 33.55,23.34 D15.13 | 32.76,23.62 33.55,23.91 D15.13 | 32.76,18.92 33.55,18.64 D15.14 | 32.76,18.92 33.55,19.21 D15.14 | 31.75,16.9 31.46,16.11 LED3.3 32.04,16.11 31.75,16.9
  Bottom 0.61: D15.11 29.84,27.81 30.18,27.48 | 30.18,27.48 30.23,27.43 30.23,24.44 | 30.23,24.44 30.23,24 D15.12 | 33.66,23.5 33.4,23.24 33.4,22.76 | v32.38,28.45 31.37,28.45 | 31.37,28.45 30.74,28.45 | 30.74,28.45 29.97,28.45 D15.11 | 33.4,22.76 33.4,20.45 | 33.4,20.45 33.4,19.79 | 33.4,19.79 33.4,19.18 D15.14 | R7.1 33.27,20.58 33.4,20.45 | 31.37,28.45 32.37,28.32 v32.38,28.45 | 31.37,28.45 32.37,28.57 v32.38,28.45 | 30.23,24.44 29.59,23.94 D15.12 | 30.23,24.44 30.25,23.64 D15.12 | 30.18,27.48 30.25,28.28 D15.11 | 30.18,27.48 29.57,28.02 D15.11 | 30.74,28.45 29.98,28.71 D15.11 | 30.74,28.45 30.08,27.99 D15.11 | 33.4,22.76 33.95,23.34 D15.13 33.26,23.55 33.4,22.76 | 33.4,19.79 33.26,19 D15.14 | 33.4,19.79 33.95,19.2 D15.14
  Bottom 0.813: D15.13 33.66,23.5
DIG_3  (via drill 0.51)
  Top 0.61: 44.6,29.44 44.2,29.84 44.2,30.34 | 44.6,29.44 44.83,29.21 v44.83,28.45 | 44.2,30.34 LED4.8 | LED4.3 44.2,16.12 | 44.6,29.44 44.7,28.43 v44.83,28.45 | 44.6,29.44 44.95,28.49 v44.83,28.45 | 44.2,30.34 44.56,31.06 LED4.8 | 44.2,30.34 43.83,31.06 LED4.8
  Top 0.813: D16.13 45.2,23.62 | 45.2,23.62 43.19,23.62 | 43.19,23.62 D16.12 | 44.2,16.9 44.2,18.03 45.09,18.92 45.2,18.92 | 44.2,16.9 44.2,16.12 | D16.14 45.2,18.92 | 43.19,23.62 42.39,23.91 D16.12 | 43.19,23.62 42.39,23.34 D16.12 | 45.2,23.62 46,23.34 D16.13 | 45.2,23.62 46,23.91 D16.13 | 45.2,18.92 46,18.64 D16.14 | 45.2,18.92 46,19.21 D16.14 | 44.2,16.9 43.91,16.11 LED4.3 44.48,16.11 44.2,16.9
  Bottom 0.61: 46.1,23.5 45.85,23.24 45.85,22.76 | D16.11 42.29,27.81 42.62,27.48 | 42.62,27.48 42.67,27.43 42.67,24.44 | 42.67,24.44 42.67,24 D16.12 | 42.29,28.7 42.55,28.45 43.18,28.45 | 45.85,22.76 45.85,20.57 | 45.85,20.57 45.85,19.79 | 45.85,19.79 45.85,19.18 D16.14 | v44.83,28.45 43.81,28.45 | 43.81,28.45 43.18,28.45 | R8.1 45.84,20.58 45.85,20.57 | 43.81,28.45 44.81,28.32 v44.83,28.45 | 43.81,28.45 44.81,28.57 v44.83,28.45 | 42.67,24.44 42.04,23.94 D16.12 | 42.67,24.44 42.7,23.64 D16.12 | 42.62,27.48 42.7,28.28 D16.11 | 42.62,27.48 42.02,28.02 D16.11 | 43.18,28.45 42.42,28.71 D16.11 | 43.18,28.45 42.52,27.99 D16.11 | 45.85,22.76 46.4,23.34 D16.13 45.7,23.55 45.85,22.76 | 45.85,19.79 45.7,19 D16.14 | 45.85,19.79 46.4,19.2 D16.14
  Bottom 0.813: D16.13 46.1,23.5 | D16.11 42.29,28.7
DIG_4  (via drill 0.51)
  Top 0.61: 56.64,29.84 57.05,29.44 | 57.05,29.44 57.28,29.21 v57.28,28.45 | 56.64,31.12 LED5.8 | LED5.3 56.64,16.12 | 57.05,29.44 57.15,28.43 v57.28,28.45 | 57.05,29.44 57.4,28.49 v57.28,28.45
  Top 0.813: 56.64,16.9 56.64,18.03 57.53,18.92 57.65,18.92 | 56.64,16.9 56.64,16.12 | D17.13 57.65,23.62 | 57.65,23.62 55.64,23.62 | 55.64,23.62 D17.12 | 56.64,29.84 56.64,30.34 | 56.64,30.34 56.64,31.12 | D17.14 57.65,18.92 | 55.64,23.62 54.84,23.91 D17.12 | 55.64,23.62 54.84,23.34 D17.12 | 57.65,23.62 58.44,23.34 D17.13 | 57.65,23.62 58.44,23.91 D17.13 | 57.65,18.92 58.44,18.64 D17.14 | 57.65,18.92 58.44,19.21 D17.14 | 56.64,16.9 56.35,16.11 LED5.3 56.93,16.11 56.64,16.9 | 56.64,30.34 56.93,31.14 LED5.8 56.35,31.14 56.64,30.34
  Bottom 0.61: D17.11 54.74,27.81 55.07,27.48 | 55.07,27.48 55.12,27.43 55.12,24.44 | 55.12,24.44 55.12,24 D17.12 | 54.74,28.7 54.99,28.45 55.63,28.45 | 58.55,23.5 58.29,23.24 58.29,22.76 | 58.29,22.76 58.29,20.57 | 58.29,20.57 58.29,19.79 | 58.29,19.79 58.29,19.18 D17.14 | v57.28,28.45 56.26,28.45 | 56.26,28.45 55.63,28.45 | R9.1 58.29,20.58 58.29,20.57 | 56.26,28.45 57.26,28.32 v57.28,28.45 | 56.26,28.45 57.26,28.57 v57.28,28.45 | 55.12,24.44 54.49,23.94 D17.12 | 55.12,24.44 55.14,23.64 D17.12 | 55.07,27.48 55.14,28.28 D17.11 | 55.07,27.48 54.47,28.02 D17.11 | 55.63,28.45 54.87,28.71 D17.11 | 55.63,28.45 54.97,27.99 D17.11 | 58.29,22.76 58.84,23.34 D17.13 58.15,23.55 58.29,22.76 | 58.29,19.79 58.15,19 D17.14 | 58.29,19.79 58.84,19.2 D17.14
  Bottom 0.813: D17.11 54.74,28.7 | D17.13 58.55,23.5
DIG_5  (via drill 0.51)
  Top 0.61: 69.09,29.84 69.5,29.44 | 69.5,29.44 69.72,29.21 v69.72,28.45 | 69.09,31.12 LED6.8 | LED6.3 69.09,16.12 | 69.5,29.44 69.6,28.43 v69.72,28.45 | 69.5,29.44 69.84,28.49 v69.72,28.45
  Top 0.813: D18.12 68.08,23.62 | 68.08,23.62 70.09,23.62 | 70.09,23.62 D18.13 | 69.09,16.9 69.09,18.03 69.98,18.92 70.09,18.92 | 69.09,16.9 69.09,16.12 | 69.09,31.12 69.09,30.34 | 69.09,30.34 69.09,29.84 | D18.14 70.09,18.92 | 68.08,23.62 67.29,23.91 D18.12 | 68.08,23.62 67.29,23.34 D18.12 | 70.09,23.62 70.89,23.34 D18.13 | 70.09,23.62 70.89,23.91 D18.13 | 70.09,18.92 70.89,18.64 D18.14 | 70.09,18.92 70.89,19.21 D18.14 | 69.09,16.9 68.8,16.11 LED6.3 69.38,16.11 69.09,16.9 | 69.09,30.34 69.38,31.14 LED6.8 68.8,31.14 69.09,30.34
  Bottom 0.61: 70.99,23.5 70.74,23.24 70.74,22.76 | 70.74,22.76 70.74,20.45 | 70.74,20.45 70.74,19.79 | 70.74,19.79 70.74,19.18 D18.14 | D18.11 67.18,27.81 67.51,27.48 | 67.51,27.48 67.56,27.43 67.56,24.44 | 67.56,24.44 67.56,24 D18.12 | 67.18,28.7 67.44,28.45 68.07,28.45 | v69.72,28.45 68.71,28.45 | 68.71,28.45 68.07,28.45 | R10.1 70.61,20.58 70.74,20.45 | 68.71,28.45 69.71,28.32 v69.72,28.45 | 68.71,28.45 69.71,28.57 v69.72,28.45 | 67.56,24.44 66.93,23.94 D18.12 | 67.56,24.44 67.59,23.64 D18.12 | 67.51,27.48 67.59,28.28 D18.11 | 67.51,27.48 66.91,28.02 D18.11 | 68.07,28.45 67.31,28.71 D18.11 | 68.07,28.45 67.42,27.99 D18.11 | 70.74,22.76 71.29,23.34 D18.13 70.59,23.55 70.74,22.76 | 70.74,19.79 70.59,19 D18.14 | 70.74,19.79 71.29,19.2 D18.14
  Bottom 0.813: D18.13 70.99,23.5 | D18.11 67.18,28.7
DIG_6  (via drill 0.51)
  Top 0.61: 81.94,29.44 81.53,29.84 81.53,30.34 | 81.94,29.44 82.17,29.21 v82.17,28.45 | 81.53,30.34 LED7.8 | LED7.3 81.53,16.12 | 81.94,29.44 82.04,28.43 v82.17,28.45 | 81.94,29.44 82.29,28.49 v82.17,28.45 | 81.53,30.34 81.9,31.06 LED7.8 | 81.53,30.34 81.17,31.06 LED7.8
  Top 0.813: D19.13 82.54,23.62 | 82.54,23.62 80.53,23.62 | 80.53,23.62 D19.12 | 81.53,16.9 81.53,18.03 82.42,18.92 82.54,18.92 | 81.53,16.9 81.53,16.12 | D19.14 82.54,18.92 | 80.53,23.62 79.73,23.91 D19.12 | 80.53,23.62 79.73,23.34 D19.12 | 82.54,23.62 83.34,23.34 D19.13 | 82.54,23.62 83.34,23.91 D19.13 | 82.54,18.92 83.34,18.64 D19.14 | 82.54,18.92 83.34,19.21 D19.14 | 81.53,16.9 81.25,16.11 LED7.3 81.82,16.11 81.53,16.9
  Bottom 0.61: D19.11 79.63,27.81 79.96,27.48 | 79.96,27.48 80.01,27.43 80.01,24.44 | 80.01,24.44 80.01,24 D19.12 | v82.17,28.45 81.15,28.45 | 81.15,28.45 80.52,28.45 | 80.52,28.45 79.88,28.45 | 79.88,28.45 79.63,28.7 | 83.44,23.5 83.19,23.24 83.19,22.76 | 83.19,22.76 83.19,20.57 | 83.19,20.57 83.19,19.79 | 83.19,19.79 83.19,19.18 D19.14 | R11.1 83.18,20.58 83.19,20.57 | 79.88,28.45 79.76,28.45 D19.11 | 81.15,28.45 82.15,28.32 v82.17,28.45 | 81.15,28.45 82.15,28.57 v82.17,28.45 | 80.01,24.44 79.38,23.94 D19.12 | 80.01,24.44 80.03,23.64 D19.12 | 79.96,27.48 80.03,28.28 D19.11 | 79.96,27.48 79.36,28.02 D19.11 | 80.52,28.45 79.76,28.71 D19.11 | 80.52,28.45 79.86,27.99 D19.11 | 83.19,22.76 83.73,23.34 D19.13 83.04,23.55 83.19,22.76 | 83.19,19.79 83.04,19 D19.14 | 83.19,19.79 83.73,19.2 D19.14
  Bottom 0.813: D19.13 83.44,23.5
DIG_7  (via drill 0.51)
  Top 0.305: LED8.3 93.98,16.12
  Top 0.61: 94.39,29.44 93.98,29.84 93.98,30.34 | 94.39,29.44 94.61,29.21 v94.61,28.45 | 93.98,30.34 LED8.8 | 94.39,29.44 94.49,28.43 v94.61,28.45 | 94.39,29.44 94.73,28.49 v94.61,28.45 | 93.98,30.34 94.34,31.06 LED8.8 | 93.98,30.34 93.62,31.06 LED8.8
  Top 0.813: D20.13 94.98,23.62 | 94.98,23.62 92.97,23.62 | 92.97,23.62 D20.12 | 93.98,16.9 93.98,18.03 94.87,18.92 94.98,18.92 | 93.98,16.9 93.98,16.12 | D20.14 94.98,18.92 | 92.97,23.62 92.18,23.91 D20.12 | 92.97,23.62 92.18,23.34 D20.12 | 94.98,23.62 95.78,23.34 D20.13 | 94.98,23.62 95.78,23.91 D20.13 | 94.98,18.92 95.78,18.64 D20.14 | 94.98,18.92 95.78,19.21 D20.14 | 93.98,16.9 93.69,16.11 LED8.3 94.27,16.11 93.98,16.9
  Bottom 0.61: D20.11 92.08,27.81 92.33,27.56 92.33,27.46 | 92.33,27.46 92.33,24.48 | 92.33,24.48 92.33,23.88 D20.12 | 92.08,28.7 92.33,28.45 92.58,28.45 92.84,28.7 92.89,28.7 | 95.89,23.5 95.63,23.24 95.63,22.76 | 95.63,22.76 95.63,20.7 | 95.63,20.7 95.63,19.79 | 95.63,19.79 95.63,19.18 D20.14 | 92.89,28.7 93.63,28.7 | 93.63,28.7 94.36,28.7 v94.61,28.45 | R12.1 95.51,20.58 95.63,20.7 | 93.63,28.7 94.57,28.33 v94.61,28.45 | 93.63,28.7 94.63,28.57 v94.61,28.45 | 92.33,24.48 91.78,23.9 D20.12 | 92.33,24.48 92.47,23.7 D20.12 | 92.33,27.46 92.47,28.25 D20.11 | 92.33,27.46 91.78,28.04 D20.11 | 92.89,28.7 92.09,28.73 D20.11 | 92.89,28.7 92.39,28.07 D20.11 | 95.63,22.76 96.18,23.34 D20.13 95.48,23.55 95.63,22.76 | 95.63,19.79 95.48,19 D20.14 | 95.63,19.79 96.18,19.2 D20.14
  Bottom 0.813: D20.11 92.08,28.7 | D20.13 95.89,23.5
DIG_8  (via drill 0.51)
  Top 0.61: 106.83,29.44 106.43,29.84 106.43,30.34 | 106.83,29.44 107.06,29.21 v107.06,28.45 | 106.43,30.34 LED9.8 | LED9.3 106.43,16.12 | 106.83,29.44 106.94,28.43 v107.06,28.45 | 106.83,29.44 107.18,28.49 v107.06,28.45 | 106.43,30.34 106.79,31.06 LED9.8 | 106.43,30.34 106.06,31.06 LED9.8
  Top 0.813: D21.13 107.43,23.62 | 107.43,23.62 105.42,23.62 | 105.42,23.62 D21.12 | 106.43,16.9 106.43,18.03 107.31,18.92 107.43,18.92 | 106.43,16.9 106.43,16.12 | D21.14 107.43,18.92 | 105.42,23.62 104.62,23.91 D21.12 | 105.42,23.62 104.62,23.34 D21.12 | 107.43,23.62 108.23,23.34 D21.13 | 107.43,23.62 108.23,23.91 D21.13 | 107.43,18.92 108.23,18.64 D21.14 | 107.43,18.92 108.23,19.21 D21.14 | 106.43,16.9 106.14,16.11 LED9.3 106.71,16.11 106.43,16.9
  Bottom 0.61: D21.11 104.52,27.81 104.85,27.48 | 104.85,27.48 104.9,27.43 104.9,24.44 | 104.9,24.44 104.9,24 D21.12 | v107.06,28.45 106.05,28.45 | 106.05,28.45 105.41,28.45 | 105.41,28.45 104.78,28.45 104.52,28.7 | 108.33,23.5 108.08,23.24 108.08,22.76 | 108.08,22.76 108.08,20.57 | 108.08,20.57 108.08,19.79 | 108.08,19.79 108.08,19.18 D21.14 | R13.1 108.07,20.58 108.08,20.57 | 106.05,28.45 107.05,28.32 v107.06,28.45 | 106.05,28.45 107.05,28.57 v107.06,28.45 | 104.9,24.44 104.27,23.94 D21.12 | 104.9,24.44 104.93,23.64 D21.12 | 104.85,27.48 104.93,28.28 D21.11 | 104.85,27.48 104.25,28.02 D21.11 | 105.41,28.45 104.65,28.71 D21.11 | 105.41,28.45 104.75,27.99 D21.11 | 108.08,22.76 108.63,23.34 D21.13 107.93,23.55 108.08,22.76 | 108.08,19.79 107.93,19 D21.14 | 108.08,19.79 108.63,19.2 D21.14
  Bottom 0.813: D21.11 104.52,28.7 | D21.13 108.33,23.5
DIG_9  (via drill 0.51)
  Top 0.61: 119.28,29.44 118.87,29.84 118.87,30.34 | 119.28,29.44 119.51,29.21 v119.51,28.45 | 118.87,30.34 LED10.8 | 119.28,29.44 119.38,28.43 v119.51,28.45 | 119.28,29.44 119.63,28.49 v119.51,28.45 | 118.87,30.34 119.23,31.06 LED10.8 | 118.87,30.34 118.51,31.06 LED10.8
  Top 0.813: D22.13 119.88,23.62 | 119.88,23.62 117.87,23.62 | 117.87,23.62 D22.12 | 117.87,23.62 117.07,23.91 D22.12 | 117.87,23.62 117.07,23.34 D22.12 | 119.88,23.62 120.67,23.34 D22.13 | 119.88,23.62 120.67,23.91 D22.13
  Bottom 0.406: 124.97,24.38 124.97,24.13 R14.1
  Bottom 0.61: D22.11 116.97,27.81 117.3,27.48 | 117.3,27.48 117.35,27.43 117.35,24.44 | 117.35,24.44 117.35,24 D22.12 | v119.51,28.45 118.49,28.45 | 118.49,28.45 117.86,28.45 | 117.86,28.45 117.22,28.45 116.97,28.7 | 120.78,23.5 120.52,23.24 120.52,22.76 | 120.52,22.76 120.52,20.57 | 120.52,20.57 120.52,19.79 | 120.52,19.79 120.52,19.18 D22.14 | 120.52,20.58 120.52,20.57 | 120.14,18.29 118.87,17.02 118.87,16.9 | 120.14,18.29 D22.14 | LED10.3 118.87,16.9 | 121.41,24.26 122.05,24.89 123.19,24.89 123.44,25.15 124.71,25.15 124.97,24.89 124.97,24.38 | 121.41,24.26 D22.13 | 118.49,28.45 119.49,28.32 v119.51,28.45 | 118.49,28.45 119.49,28.57 v119.51,28.45 | 117.35,24.44 116.72,23.94 D22.12 | 117.35,24.44 117.37,23.64 D22.12 | 117.3,27.48 117.37,28.28 D22.11 | 117.3,27.48 116.7,28.02 D22.11 | 117.86,28.45 117.1,28.71 D22.11 | 117.86,28.45 117.2,27.99 D22.11 | 120.52,22.76 121.07,23.34 D22.13 | 120.52,22.76 120.38,23.55 D22.13 | 121.41,24.26 120.65,24.01 D22.13 | 121.41,24.26 121.16,23.5 D22.13 | 120.52,19.79 120.38,19 D22.14 | 120.52,19.79 121.07,19.2 D22.14 | 120.14,18.29 120.9,18.54 D22.14 | 120.14,18.29 120.39,19.05 D22.14 | 118.87,16.9 118.51,16.19 LED10.3 | 118.87,16.9 119.23,16.19 LED10.3
  Bottom 0.813: D22.11 116.97,28.7 | D22.13 120.78,23.5
DIG_10  (via drill 0.51)
  Top 0.61: 131.63,29.54 131.32,29.84 131.32,30.34 | 131.63,29.54 131.95,29.21 v131.95,28.57 | 131.32,30.34 LED11.8 | LED11.3 131.32,16.12 | 131.63,29.54 131.83,28.55 v131.95,28.57 | 131.63,29.54 132.07,28.63 v131.95,28.57 | 131.32,30.34 131.68,31.06 LED11.8 | 131.32,30.34 130.96,31.06 LED11.8
  Top 0.813: D23.13 132.32,23.62 | 132.32,23.62 130.31,23.62 | 130.31,23.62 D23.12 | 131.32,16.9 131.32,18.54 131.7,18.92 132.32,18.92 | 131.32,16.9 131.32,16.12 | D23.14 132.32,18.92 | 130.31,23.62 129.52,23.91 D23.12 | 130.31,23.62 129.52,23.34 D23.12 | 132.32,23.62 133.12,23.34 D23.13 | 132.32,23.62 133.12,23.91 D23.13 | 132.32,18.92 133.12,18.64 D23.14 | 132.32,18.92 133.12,19.21 D23.14 | 131.32,16.9 131.03,16.11 LED11.3 131.6,16.11 131.32,16.9
  Bottom 0.61: 133.22,23.5 132.97,23.24 132.97,22.76 | 132.97,22.76 132.97,20.45 | 132.97,20.45 132.97,19.79 | 132.97,19.79 132.97,19.18 D23.14 | D23.11 129.41,27.81 129.57,27.44 | 129.57,27.44 129.79,26.92 129.79,24.44 | 129.79,24.44 129.79,24 D23.12 | v131.95,28.57 130.94,28.57 | 130.94,28.57 130.28,28.57 | 130.28,28.57 129.67,28.57 129.41,28.7 | R15.1 132.84,20.58 132.97,20.45 | 130.94,28.57 131.94,28.45 v131.95,28.57 | 130.94,28.57 131.94,28.7 v131.95,28.57 | 129.79,24.44 129.16,23.94 D23.12 | 129.79,24.44 129.82,23.64 D23.12 | 129.57,27.44 129.8,28.21 D23.11 | 129.57,27.44 129.09,28.07 D23.11 | 130.28,28.57 129.49,28.72 D23.11 | 130.28,28.57 129.69,28.02 D23.11 | 132.97,22.76 133.52,23.34 D23.13 132.82,23.55 132.97,22.76 | 132.97,19.79 132.82,19 D23.14 | 132.97,19.79 133.52,19.2 D23.14
  Bottom 0.813: D23.13 133.22,23.5 | D23.11 129.41,28.7
DIG_11  (via drill 0.51)
  Top 0.61: 144.17,29.44 143.76,29.84 143.76,30.34 | 144.17,29.44 144.4,29.21 v144.4,28.45 | 143.76,30.34 LED12.8 | LED12.3 143.76,16.9 | 143.76,16.9 143.76,18.29 | 144.17,29.44 144.27,28.43 v144.4,28.45 | 144.17,29.44 144.52,28.49 v144.4,28.45 | 143.76,16.9 143.4,16.19 LED12.3 | 143.76,16.9 144.13,16.19 LED12.3 | 143.76,30.34 144.13,31.06 LED12.8 | 143.76,30.34 143.4,31.06 LED12.8
  Top 0.813: D24.13 144.77,23.62 | 144.77,23.62 142.76,23.62 | 142.76,23.62 D24.12 | 143.76,18.29 144.27,18.8 144.78,18.8 | 144.78,18.8 145.54,18.8 D24.14 | 142.76,23.62 141.96,23.91 D24.12 | 142.76,23.62 141.96,23.34 D24.12 | 144.77,23.62 145.57,23.34 D24.13 | 144.77,23.62 145.57,23.91 D24.13 | 144.78,18.8 145.61,18.62 D24.14 | 144.78,18.8 145.53,19.19 D24.14
  Bottom 0.61: D24.11 141.86,27.81 142.19,27.48 | 142.19,27.48 142.24,27.43 142.24,24.44 | 142.24,24.44 142.24,24 D24.12 | 141.86,28.7 142.11,28.45 142.75,28.45 | 145.67,23.5 145.41,23.24 145.41,22.76 | 145.41,22.76 145.41,20.83 | 145.41,20.83 145.41,19.79 | 145.41,19.79 145.41,19.18 D24.14 | v144.4,28.45 143.38,28.45 | 143.38,28.45 142.75,28.45 | R16.1 145.29,20.7 145.41,20.83 | 143.38,28.45 144.38,28.32 v144.4,28.45 | 143.38,28.45 144.38,28.57 v144.4,28.45 | 142.24,24.44 141.61,23.94 D24.12 | 142.24,24.44 142.26,23.64 D24.12 | 142.19,27.48 142.26,28.28 D24.11 | 142.19,27.48 141.59,28.02 D24.11 | 142.75,28.45 141.99,28.71 D24.11 | 142.75,28.45 142.09,27.99 D24.11 | 145.41,22.76 145.97,23.34 D24.13 145.27,23.55 145.41,22.76 | 145.41,19.79 145.27,19 D24.14 | 145.41,19.79 145.97,19.2 D24.14
  Bottom 0.813: D24.11 141.86,28.7 | D24.13 145.67,23.5
DIG_12  (via drill 0.51)
  Top 0.61: 156.62,29.44 156.21,29.84 156.21,30.34 | 156.62,29.44 156.84,29.21 v156.84,28.45 | LED13.8 156.21,30.34 | 156.21,16.12 LED13.3 | 156.62,29.44 156.72,28.43 v156.84,28.45 | 156.62,29.44 156.96,28.49 v156.84,28.45 | 156.21,30.34 156.57,31.06 LED13.8 | 156.21,30.34 155.85,31.06 LED13.8
  Top 0.813: D25.13 157.22,23.62 | 157.22,23.62 155.21,23.62 | 155.21,23.62 D25.12 | 156.21,16.12 156.21,16.9 | 156.21,16.9 156.21,18.03 156.97,18.8 157.22,18.8 | 157.22,18.8 157.99,18.8 D25.14 | 155.21,23.62 154.41,23.91 D25.12 | 155.21,23.62 154.41,23.34 D25.12 | 157.22,23.62 158.01,23.34 D25.13 | 157.22,23.62 158.01,23.91 D25.13 | 157.22,18.8 158.05,18.62 D25.14 | 157.22,18.8 157.97,19.19 D25.14 | 156.21,16.9 155.92,16.11 LED13.3 156.5,16.11 156.21,16.9
  Bottom 0.61: 158.12,23.5 157.86,23.24 157.86,22.76 | 157.86,22.76 157.86,20.7 | 157.86,20.7 157.86,19.79 | 157.86,19.79 157.86,19.18 D25.14 | D25.11 154.31,27.81 154.63,27.48 | 154.63,27.48 154.69,27.43 154.69,24.44 | 154.69,24.44 154.69,24 D25.12 | v156.84,28.45 155.83,28.45 | 155.83,28.45 155.2,28.45 | 155.2,28.45 154.56,28.45 154.31,28.7 | R17.1 157.74,20.58 157.86,20.7 | 155.83,28.45 156.83,28.32 v156.84,28.45 | 155.83,28.45 156.83,28.57 v156.84,28.45 | 154.69,24.44 154.05,23.94 D25.12 | 154.69,24.44 154.71,23.64 D25.12 | 154.63,27.48 154.71,28.28 D25.11 | 154.63,27.48 154.03,28.02 D25.11 | 155.2,28.45 154.44,28.71 D25.11 | 155.2,28.45 154.54,27.99 D25.11 | 157.86,22.76 158.41,23.34 D25.13 157.72,23.55 157.86,22.76 | 157.86,19.79 157.72,19 D25.14 | 157.86,19.79 158.41,19.2 D25.14
  Bottom 0.813: D25.13 158.12,23.5 | D25.11 154.31,28.7
DIG_13  (via drill 0.51)
  Top 0.61: 169.06,29.44 168.66,29.84 168.66,30.34 | 169.06,29.44 169.29,29.21 v169.29,28.45 | 168.66,30.34 LED14.8 | LED14.3 168.66,16.12 | 169.06,29.44 169.16,28.43 v169.29,28.45 | 169.06,29.44 169.41,28.49 v169.29,28.45 | 168.66,30.34 169.02,31.06 LED14.8 | 168.66,30.34 168.29,31.06 LED14.8
  Top 0.813: D26.13 169.66,23.62 | 169.66,23.62 167.65,23.62 | 167.65,23.62 D26.12 | D26.14 169.66,18.92 | 169.66,18.92 169.04,18.92 168.66,18.54 168.66,16.9 | 168.66,16.9 168.66,16.12 | 167.65,23.62 166.85,23.91 D26.12 | 167.65,23.62 166.85,23.34 D26.12 | 169.66,23.62 170.46,23.34 D26.13 | 169.66,23.62 170.46,23.91 D26.13 | 169.66,18.92 170.46,18.64 D26.14 | 169.66,18.92 170.46,19.21 D26.14 | 168.66,16.9 168.37,16.11 LED14.3 168.94,16.11 168.66,16.9
  Bottom 0.61: D26.11 166.75,27.81 167.08,27.48 | 167.08,27.48 167.13,27.43 167.13,24.44 | 167.13,24.44 167.13,24 D26.12 | v169.29,28.45 168.28,28.45 | 168.28,28.45 167.64,28.45 | 167.64,28.45 167,28.45 166.75,28.7 | 170.56,23.5 170.31,23.24 170.31,22.76 | 170.31,22.76 170.31,20.57 | 170.31,20.57 170.31,19.79 | 170.31,19.79 170.31,19.18 D26.14 | R18.1 170.3,20.58 170.31,20.57 | 168.28,28.45 169.28,28.32 v169.29,28.45 | 168.28,28.45 169.28,28.57 v169.29,28.45 | 167.13,24.44 166.5,23.94 D26.12 | 167.13,24.44 167.16,23.64 D26.12 | 167.08,27.48 167.16,28.28 D26.11 | 167.08,27.48 166.48,28.02 D26.11 | 167.64,28.45 166.88,28.71 D26.11 | 167.64,28.45 166.98,27.99 D26.11 | 170.31,22.76 170.86,23.34 D26.13 170.16,23.55 170.31,22.76 | 170.31,19.79 170.16,19 D26.14 | 170.31,19.79 170.86,19.2 D26.14
  Bottom 0.813: D26.11 166.75,28.7 | D26.13 170.56,23.5
DIG_14  (via drill 0.51)
  Top 0.61: 181.51,29.44 181.1,29.84 181.1,30.34 | 181.51,29.44 181.74,29.21 v181.74,28.45 | 181.1,30.34 LED15.8 | LED15.3 181.1,16.9 | 181.1,16.9 181.1,17.02 182.37,18.29 | 182.37,18.29 D27.14 | 181.51,29.44 181.61,28.43 v181.74,28.45 | 181.51,29.44 181.86,28.49 v181.74,28.45 | 182.37,18.29 183.13,18.54 D27.14 | 182.37,18.29 182.62,19.05 D27.14 | 181.1,16.9 180.74,16.19 LED15.3 | 181.1,16.9 181.47,16.19 LED15.3 | 181.1,30.34 181.47,31.06 LED15.8 | 181.1,30.34 180.74,31.06 LED15.8
  Top 0.813: D27.13 182.11,23.62 | 182.11,23.62 180.1,23.62 | 180.1,23.62 D27.12 | D27.14 182.88,18.92 | 180.1,23.62 179.3,23.91 D27.12 | 180.1,23.62 179.3,23.34 D27.12 | 182.11,23.62 182.9,23.34 D27.13 | 182.11,23.62 182.9,23.91 D27.13
  Bottom 0.61: D27.11 179.2,27.81 179.53,27.48 | 179.53,27.48 179.58,27.43 179.58,24.44 | D27.12 179.58,24 179.58,24.44 | v181.74,28.45 180.72,28.45 | 180.72,28.45 180.09,28.45 | 180.09,28.45 179.45,28.45 179.2,28.7 | D27.14 183.01,19.68 182.88,19.81 | 182.88,19.81 182.88,20.7 | 182.88,20.7 182.88,22.73 | 182.88,22.73 182.88,23.5 | R19.1 182.76,20.58 182.88,20.7 | 180.72,28.45 181.72,28.32 v181.74,28.45 | 180.72,28.45 181.72,28.57 v181.74,28.45 | 179.58,24.44 178.95,23.94 D27.12 | 179.58,24.44 179.6,23.64 D27.12 | 179.53,27.48 179.6,28.28 D27.11 | 179.53,27.48 178.93,28.02 D27.11 | 180.09,28.45 179.33,28.71 D27.11 | 180.09,28.45 179.43,27.99 D27.11 | 182.88,22.73 183.34,23.39 D27.13 182.62,23.49 182.88,22.73 | 182.88,19.81 182.62,19.05 D27.14 | 182.88,19.81 183.34,19.16 D27.14
  Bottom 0.813: D27.11 179.2,28.7 | D27.13 182.88,23.5
IO-A  (via drill 0.51)
  Top 0.61: R29.2 R36.2 | v107.19,10.67 106.17,10.67 | 106.17,10.67 105.66,10.16 101.18,10.16 | 101.18,10.16 100.58,10.16 R29.2 | 106.17,10.67 107.17,10.54 v107.19,10.67 | 106.17,10.67 107.17,10.79 v107.19,10.67 | 101.18,10.16 100.27,10.9 R29.2 | 101.18,10.16 100.02,10.37 R29.2
  Bottom 0.406: 133.86,9.4 135.64,9.4 | 133.35,10.67 133.35,11.18 132.08,11.94 130.81,11.43 130.68,11.3 130.56,11.3 129.41,10.29 108.13,10.29 | 108.13,10.29 107.7,10.29 v107.19,10.67 | 108.13,10.29 107.32,10.86 v107.19,10.67 | 108.13,10.29 107.15,10.44 v107.19,10.67